# EAGLE board PIR_MOC_Routed (EAGLE 6.0)
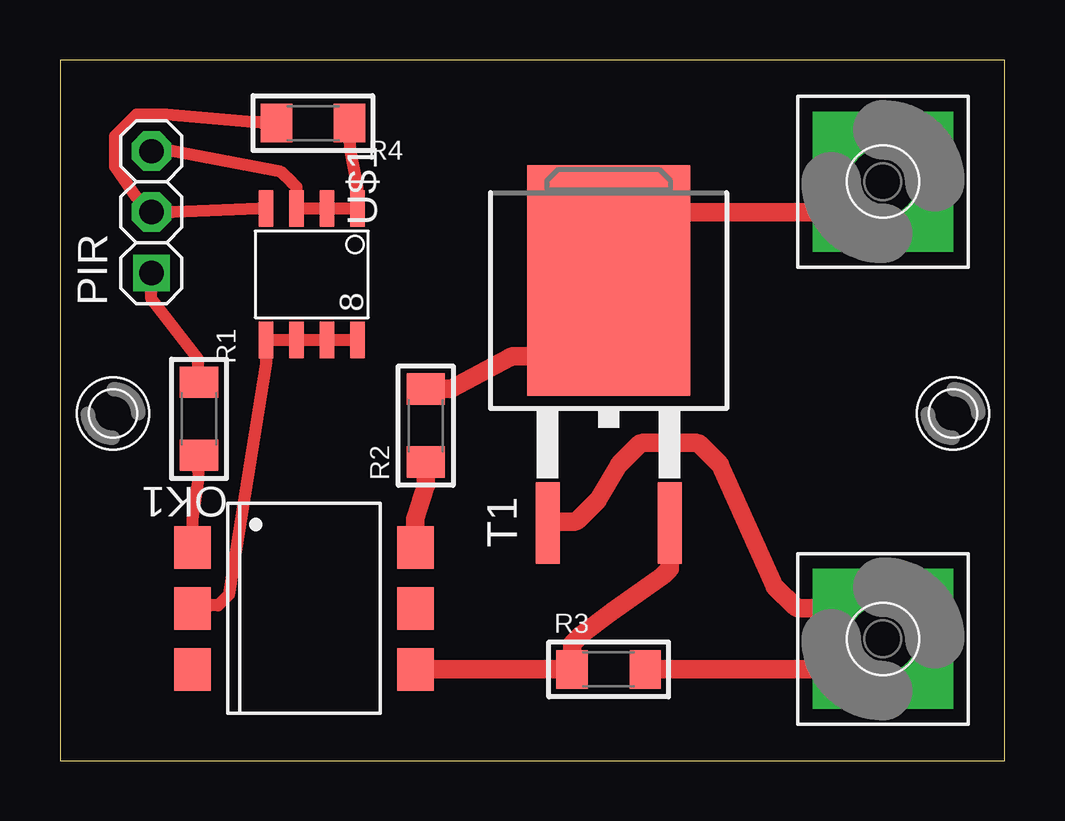
[diagram p0: board, top side]

Size 39.37 x 29.2 mm. Coordinates in mm from the lower left corner, seen from the top.
Outline: 0,0 39.37,0 39.37,29.2 0,29.2 0,0
Copper layers 1+16: Top 0.035mm / dielectric 0.15mm / Bottom 0.035mm
Design rules: minimum track width 0.508mm, track to track 0.508mm, copper to edge 1.016mm, minimum pad ring 0.1mm, minimum via ring 0.1mm
Net classes: 0 220V: width 0.762 mm, clearance 1.27 mm; 1 LowVolt: width 0.508 mm, clearance 1.27 mm to class 0, clearance 0.508 mm

## Footprints (pad centres in the part's own frame; a part is rotated, then mirrored left to right if it is on the bottom)
holes$ = drill 2.8 pad 5.842 square: B2,8 0,0
optocoupler$ = smd 1.78 x 1.52: 1 -2.54,-4.645; 2 0,-4.645; 3 2.54,-4.645; 4 2.54,4.645; 5 0,4.645; 6 -2.54,4.645
pinhead-2$ = drill 1.016 pad 1.524 square: 1 -2.54,0 | drill 1.016 pad 1.649 octagon: 2 0,0; 3 2.54,0
rc-master-smd$ = smd 1.3 x 1.6: 1 -1.524,0; 2 1.524,0
my-library$' = smd 1 x 3.4: 1 -2.54,-6.6; 2 2.54,-6.6 | smd 6.8 x 9.6: 3 0,3.5
my-library$'' = smd 1.524 x 0.61: 1 -2.743,1.905; 2 -2.743,0.635; 3 -2.743,-0.635; 4 -2.743,-1.905; 5 2.743,-1.905; 6 2.743,-0.635; 7 2.743,0.635; 8 2.743,1.905

## Placement (x,y rotation side)
H1  [holes$]  34.29,24.13 0 top
H2  [holes$]  34.29,5.08 0 top
H3  [my-library$]  19.71,15.47 0 top
OK1  MOC3043S  [optocoupler$]  10.16,6.35 270 top
PIR  [pinhead-2$]  3.81,22.86 90 top
R1  680  [rc-master-smd$]  5.79,14.25 270 top
R2  360  [rc-master-smd$]  15.24,13.97 90 top
R3  360  [rc-master-smd$]  22.86,3.81 0 top
R4  10k  [rc-master-smd$]  10.54,26.57 180 top
T1  BT136-D2PACK  [my-library$']  22.86,16.51 0 top
U$1  IRF7403  [my-library$'']  10.49,20.27 270 top

## Library data of the parts
H1 H2 = $2,8-PAD-SQUARE
H3 = $CASE_20-31_VHOLES
OK1 = $DIL6-SMD
PIR = $1X03-S
R1-R4 = $R1206
T1 = $TO263
U$1 = $SO-8

## Nets
220_AC: H1.B2,8 R2.2 T1.3
220_MOC_AC: OK1.6 R2.1
220_MOC_N: OK1.4 R3.1 T1.2
220_N: H2.B2,8 R3.2 T1.1
+12V [LowVolt]: PIR.1 R1.1
GND [LowVolt]: PIR.3 R4.1 U$1.1 U$1.2 U$1.3
N$5 [LowVolt]: OK1.2 U$1.5 U$1.6 U$1.7 U$1.8
N$6 [LowVolt]: OK1.1 R1.2
N$7 [LowVolt]: PIR.2 R4.2 U$1.4

## Tracks (layer width: path | path; a pad name or v marks a point on that pad's centre or on a via)
220_AC
  Top 0.762: H1.B2,8 31.75,22.86 31.37,22.86 26.26,22.86 25.88,22.86 T1.3 19.84,16.86 19.46,16.86 18.86,16.86 18.72,16.8 16.31,15.49 16.04,15.49 15.66,15.49 R2.2
220_MOC_AC
  Top 0.762: R2.1 15.24,12.18 15.24,11.8 15.24,11.46 14.8,10.1 14.8,9.78 14.8,9.4 OK1.6
220_MOC_N
  Top 0.762: OK1.4 15.18,3.81 15.56,3.81 20.69,3.81 21.07,3.81 R3.1 21.34,4.23 21.34,4.61 21.34,4.88 21.72,5.26 22.99,6.2 25.11,7.71 25.4,8 25.4,8.21 25.4,8.59 T1.2
220_N
  Top 0.762: R3.2 24.65,3.81 25.03,3.81 31.37,3.81 31.75,3.81 H2.B2,8 31.75,6.35 31.37,6.35 30.77,6.35 30.63,6.41 29.78,7.26 27.49,12.35 26.64,13.2 26.5,13.26 25.5,13.26 24.3,13.26 24.16,13.2 23.31,12.35 22.41,10.87 21.56,10.02 21.42,9.96 20.82,9.96 20.44,9.96 T1.1
+12V
  Top 0.508: R1.1 5.75,16.17 5.75,16.42 5.75,16.74 3.81,19.24 3.81,19.56 3.81,19.81 PIR.1
GND
  Top 0.508: R4.1 12.06,26.02 12.06,25.77 12.06,25.5 12.39,23.9 12.39,23.77 12.39,23.52 U$1.1 12.34,23.01 12.09,23.01 11.43,23.01 11.18,23.01 U$1.2 11.07,23.01 10.82,23.01 10.16,23.01 9.91,23.01 U$1.3 9.86,23.52 9.86,23.77 9.86,23.9 9.68,24.08 9.21,24.54 4.7,25.4 4.57,25.4 4.32,25.4 PIR.3
N$5
  Top 0.508: OK1.2 6.02,6.48 6.28,6.48 6.59,6.48 7.04,6.92 8.59,16.64 8.59,16.76 8.59,17.02 U$1.5 8.64,17.53 8.89,17.53 9.55,17.53 9.8,17.53 U$1.6 9.91,17.53 10.16,17.53 10.82,17.53 11.07,17.53 U$1.7 11.18,17.53 11.43,17.53 12.09,17.53 12.34,17.53 U$1.8
N$6
  Top 0.508: R1.2 5.75,12.33 5.75,12.07 5.75,11.76 5.51,10.1 5.51,9.78 5.51,9.53 OK1.1
N$7
  Top 0.508: R4.2 8.62,26.61 8.37,26.61 8.05,26.61 4.44,26.92 3.81,26.92 3.18,26.92 2.73,26.48 2.29,26.03 2.29,25.4 2.29,24.77 3.18,23.49 3.27,23.4 3.45,23.22 PIR.2 4.32,22.86 4.57,22.86 4.7,22.86 8.28,23.01 8.53,23.01 U$1.4